# Altium PCB PCB1.PcbDoc (part 3 of 3)
Units mm, origin at the board's own origin, x right, y up, seen from the top; angles counter-clockwise.
Board outline 232.8 x 105.73 mm, 4 copper layers (Top Layer, Power Layer, GND Layer, Bottom Layer), stack 1.714 mm thick; 607 components, 390 nets, 1962 pads, 57 vias.
Unrouted connection lines stored in the file: 1386.
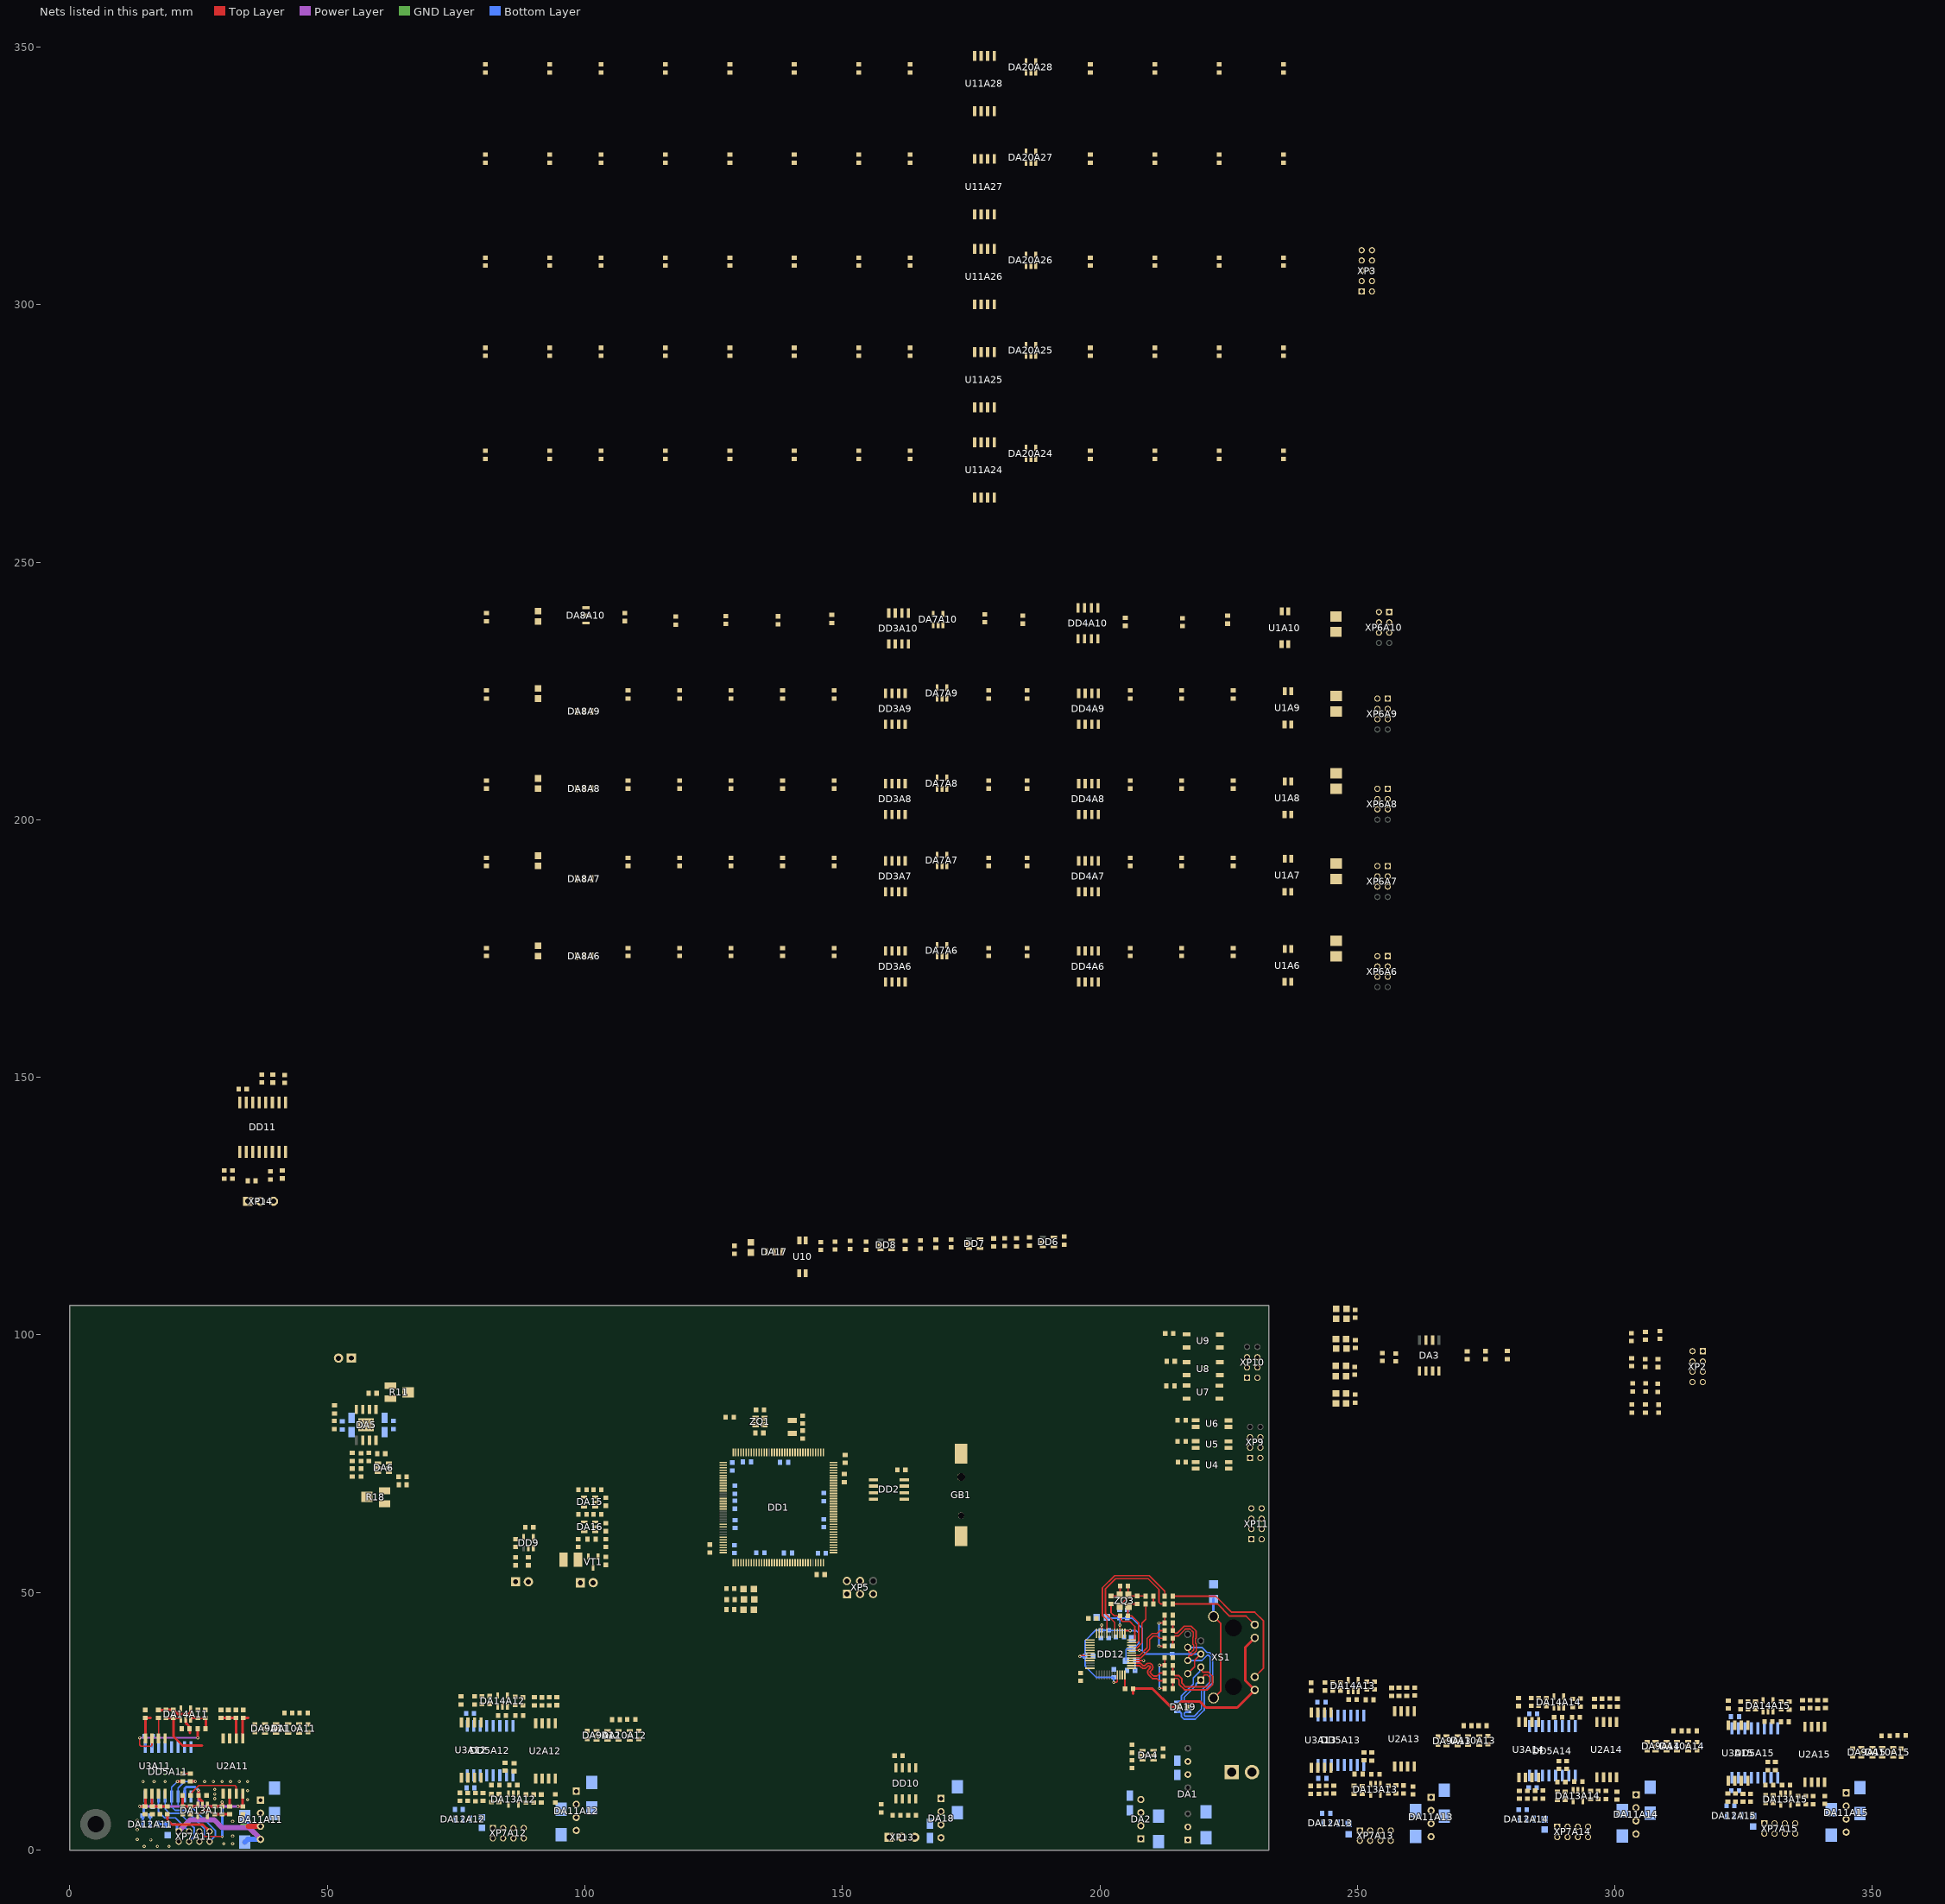
[diagram p4: the nets of this part, all layers, seen from the top]

## Via types
v1: diameter 0.6, hole 0.3, Top Layer to Bottom Layer, tented both sides, 44 vias
v2: diameter 0.6, hole 0.3, Top Layer to Bottom Layer, 12 vias
v3: diameter 0.5, hole 0.2, Top Layer to Bottom Layer, tented both sides, 1 vias

## Nets (pads, with @x,y where several pads share a name; then routed paths per layer and width w, separated by ;. In a path a pad name is that pad's centre, name@x,y a point inside that pad or via, vN(x,y) a via of type N, cw(c..) or ccw(c..) an arc to the next point about the centre after c; other vN are vias at no path point) (continued)
TD_N: (continued)
  Bottom Layer w0.3: DA19.6@215.013,28.746 215.138,28.871 215.636,28.871 215.811,29.047 215.811,29.903 218.113,32.205 218.113,33.384 219.394,34.665 219.394,35.31 XS1.3@219.603,35.519
TD_P: DA19.1 R65.1 R71.2 XS1.1 | length 20.6
  Top Layer w0.3: R71.2@214.138,34.349 214.138,34.299 214.561,33.876 215.29,33.876 215.918,33.248 215.918,32.4 216.646,31.671 220.68,31.671 221.309,32.301 221.309,33.525 220.863,33.972 220.31,33.972 220.135,33.796 220.135,33.51 XS1.1@219.603,32.979
  Top Layer w0.381: R71.2@214.138,34.349 R65.1@214.138,35.85
  Bottom Layer w0.3: DA19.1@217.163,28.746 217.038,28.871 216.541,28.871 216.365,29.047 216.365,29.673 218.667,31.975 218.667,32.253 218.843,32.429 219.053,32.429 XS1.1@219.603,32.979
Tx485: DD1.69 DD11.6
TXO_N: DD12.2 R68.1 | length 4
  Top Layer w0.3: DD12.2@206.163,35.772 207.691,35.771 ; 210.303,33.271 211.063,33.271 211.486,32.849 R68.1@212.588,32.849
TXO_P: DD12.3 R71.1 | length 4
  Top Layer w0.3: DD12.3@206.163,36.272 207.909,36.271 208.05,36.13 ; 210.803,33.771 211.063,33.771 211.641,34.349 R71.1@212.588,34.349
XSCI: DD12.12 R75.2 R77.1 | length 11
  Top Layer w0.3: R77.1@202.163,47.772 202.163,46.071 202.763,45.471 R75.2@203.888,45.472 204.013,45.347 204.013,44.722 204.363,44.371 205.797,44.371 206.763,43.405 206.763,40.771 DD12.12@206.163,40.772
XSCO: C109.1 DD12.11 R75.1 ZQ3.1 | length 11.4
  Top Layer w0.3: DD12.11@206.163,40.272 207.208,40.271 207.528,40.591 207.528,44.106 206.163,45.471 R75.1@205.438,45.472 205.438,47.146 ZQ3.1@205.563,47.272 205.563,47.321 206.013,47.771 C109.1@207.238,47.772
pads on no net: DA1.3 DA1.5 DA1.8 DA3.5 DA3.8 DA5.5 DD1.22 DD1.49 DD1.50 DD1.56 DD1.57 DD1.58 DD1.59 DD1.60 DD1.63 DD1.64 DD1.65 DD1.104 DD6.1 DD7.1 DD8.1 DD9.1 DD12.18 DD12.19 DD12.21 DD12.34 DD12.35 DD12.37 DD12.38 DD12.39 DD12.40 DD12.41 DD12.42 DD12.43 DD12.44 XP5.6 XP6A6.7 XP6A6.8 XP6A7.7 XP6A7.8 XP6A8.7 XP6A8.8 XP6A9.7 XP6A9.8 XP6A10.7 XP6A10.8 XP9.7 XP9.8 XP10.7 XP10.8 XS1. XS1.7 XS1.8

## Polygon pours and split planes (outlines as drawn)
GND_DRVA11 on Top Layer "GND_DRVA11_L01_P000" (solid, remove dead copper, pour order 0): 15.425,15.5 11.997,12.072 11.997,0 35.175,0 35.175,15.5
GND_DRVA11 on Bottom Layer "GND_DRVA11_L04_P001" (solid, remove dead copper, pour order 1): 15.425,15.5 12,12.075 12,0 35.178,0 35.178,15.5
GND_DRVA11 on GND Layer "GND_DRVA11_L03_P002" (solid, remove dead copper, pour order 2): 14.175,14.25 11.997,12.072 11.997,0 35.175,0 35.175,14.25

## Silkscreen, mask and mechanical layers (free items; w line width, h text height)
Top Assy:
  circle w0.2: c5,5 r1.6
Bottom Assy:
  circle w0.2: c5,5 r1.6